# Altium PCB SolarArray1.PcbDoc
Units mm, origin at the board's own origin, x right, y up, seen from the top; angles counter-clockwise.
Board outline 82 x 320 mm, 2 copper layers (Top Layer, Bottom Layer), stack 1.567 mm thick; 59 components, 33 nets, 165 pads, 0 vias.
Unrouted connection lines stored in the file: 73.
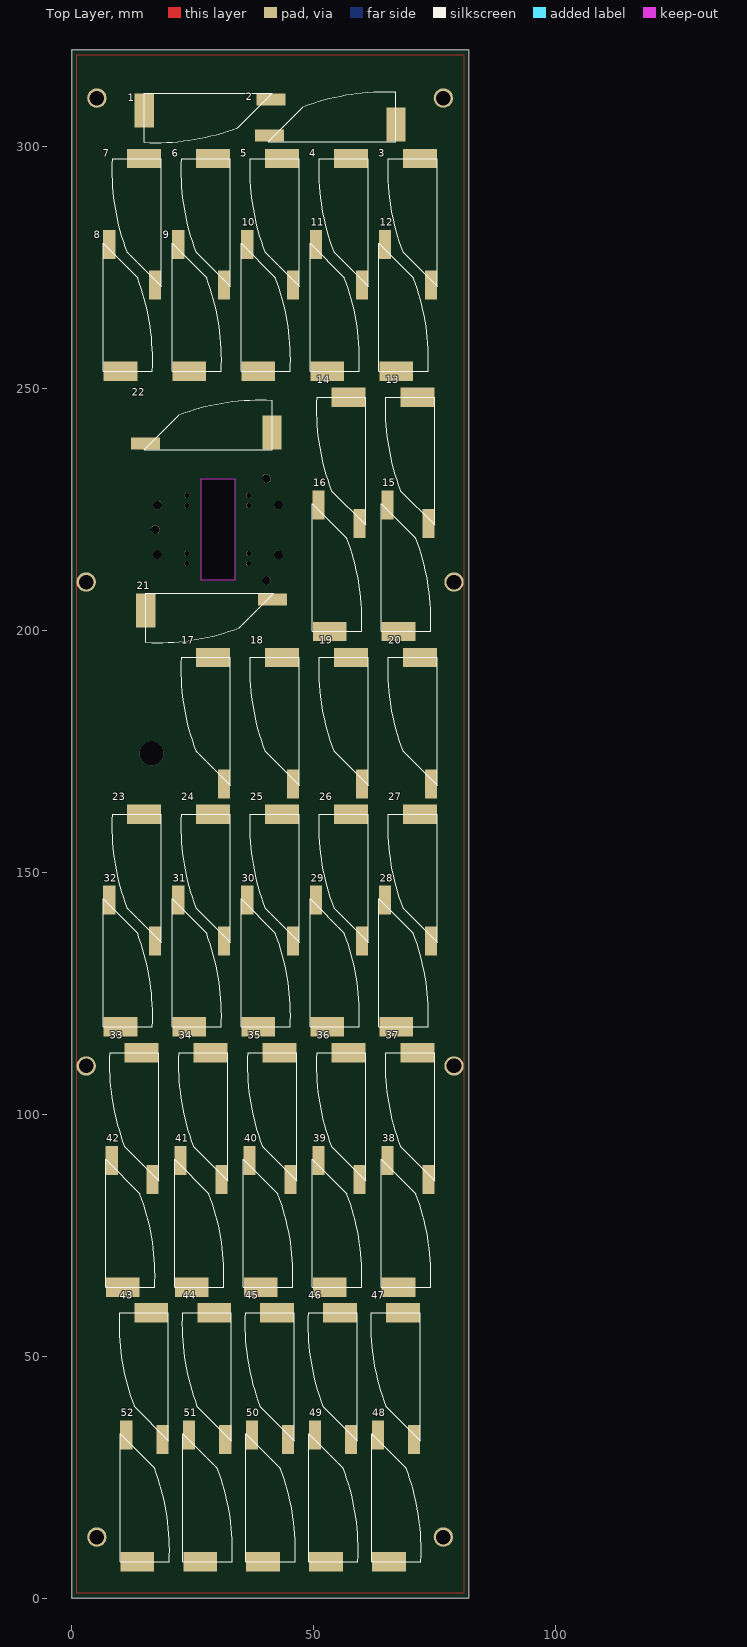
[diagram p0: Top Layer view]
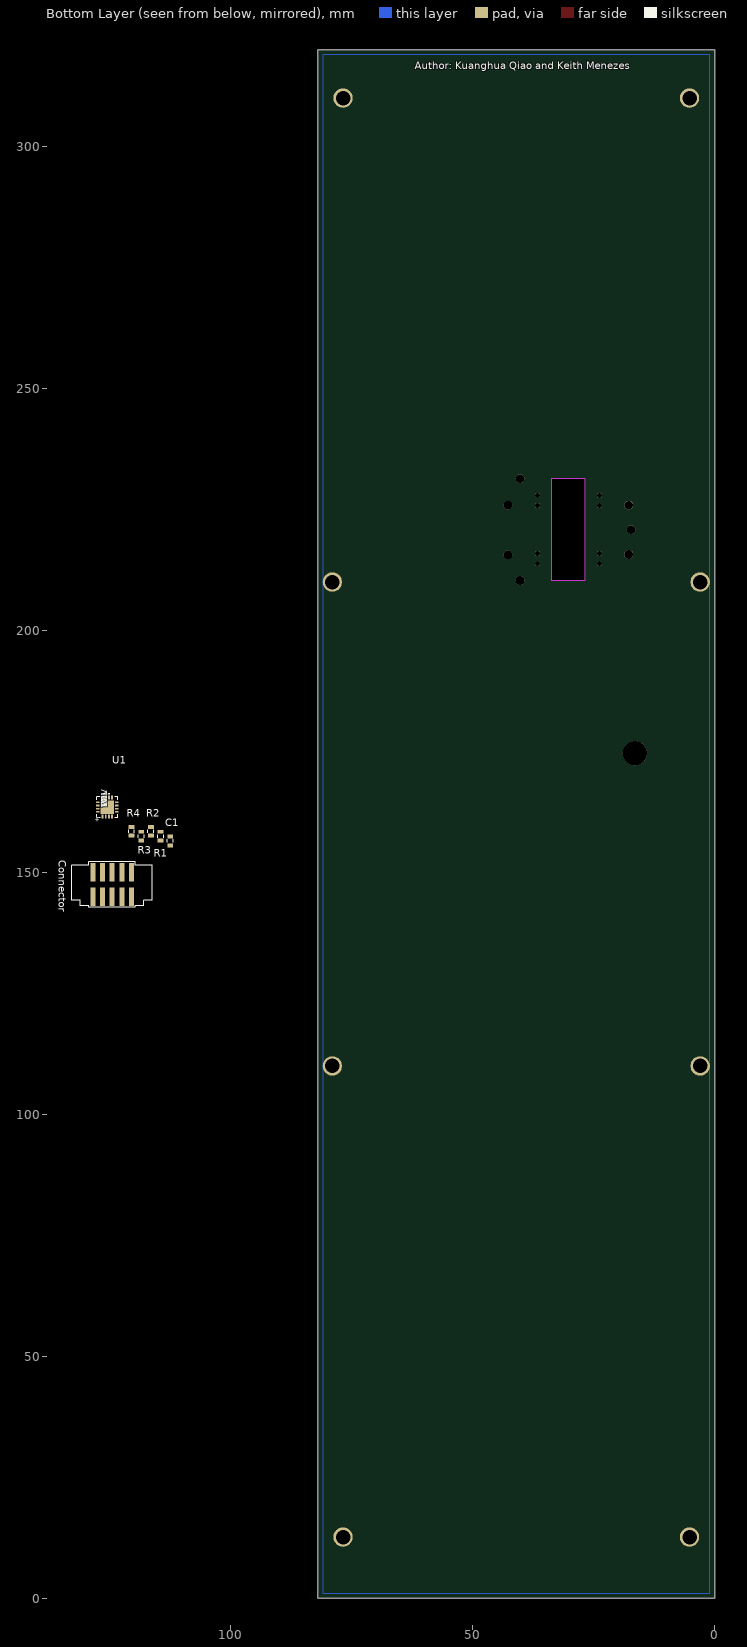
[diagram p1: Bottom Layer view, seen from below]

## Layer stack, top to bottom
Top Solder: solder mask 0.0102, Solder Resist, Dk 3.5
Top Layer: signal copper 0.0356
Dielectric 1: dielectric 1.4961, FR-4, Dk 4.8
Bottom Layer: signal copper 0.0356
Bottom Solder: solder mask 0.0102, Solder Resist, Dk 3.5

## Board outline
82,0 82,320 0,320 0,0
cut-out: 33.721,231.381 33.721,210.381 26.721,210.381 26.721,231.381

## Design rules (kind name [scope] priority, off if disabled: settings)
Clearance [All] p1: gap=0.254 ignorepadtopadclearanceinfootprint=FALSE except(0: Arc-Hole Track-Hole SMDPad-Hole THPad-Hole Via-Hole Fill-Hole Poly-Hole Region-Hole Text-Hole)
PolygonConnect [All] p1: connectstyle=Relief reliefconductorwidth=0.254 reliefentries=4 polygonreliefangle="90 Angle" airgapwidth=0.254
RoutingVias [All] p1: holewidth=0.711 width=1.27 viastyle="Through Hole" minholewidth=0.711 minwidth=1.27 maxholewidth=0.711 maxwidth=1.27
SolderMaskExpansion [All] p1: expansion=0.102
Width [All] p1: maxlimit=1 minlimit=0.254 preferedwidth=0.254 minimp=50.000000 maximp=50.000000 favimp=50.000000
30 further rules are at their usual default settings.

## Components (designator, comment, footprint, x,y, rotation, side; value= is the part's Value field where it differs from the comment)
1 "Trisol X Solar Wing" PCBCOMPONENT_1 44.2,311 r180 top
2 "Trisol X Solar Wing" PCBCOMPONENT_1 37.8,301 r0 top
3 "Trisol X Solar Wing" PCBCOMPONENT_1 75.5,268.3 r90 top
4 "Trisol X Solar Wing" PCBCOMPONENT_1 61.25,268.3 r90 top
5 "Trisol X Solar Wing" PCBCOMPONENT_1 47,268.3 r90 top
6 "Trisol X Solar Wing" PCBCOMPONENT_1 32.75,268.3 r90 top
7 "Trisol X Solar Wing" PCBComponent_1 18.5,268.3 r90 top
8 "Trisol X Solar Wing" PCBComponent_1 6.5,282.8 r270 top
9 "Trisol X Solar Wing" PCBCOMPONENT_1 20.75,282.8 r270 top
10 "Trisol X Solar Wing" PCBCOMPONENT_1 35,282.8 r270 top
11 "Trisol X Solar Wing" PCBCOMPONENT_1 49.25,282.8 r270 top
12 "Trisol X Solar Wing" PCBCOMPONENT_1 63.5,282.8 r270 top
13 "Trisol X Solar Wing" PCBCOMPONENT_1 75,219 r90 top
14 "Trisol X Solar Wing" PCBCOMPONENT_1 60.75,219 r90 top
15 "Trisol X Solar Wing" PCBCOMPONENT_1 64,229 r270 top
16 "Trisol X Solar Wing" PCBCOMPONENT_1 49.75,229 r270 top
17 "Trisol X Solar Wing" PCBCOMPONENT_1 32.75,165.2 r90 top
18 "Trisol X Solar Wing" PCBCOMPONENT_1 47,165.2 r90 top
19 "Trisol X Solar Wing" PCBCOMPONENT_1 61.25,165.2 r90 top
20 "Trisol X Solar Wing" PCBCOMPONENT_1 75.5,165.2 r90 top
21 "Trisol X Solar Wing" PCBCOMPONENT_1 44.548,207.67 r180 top
22 "Trisol X Solar Wing" PCBCOMPONENT_1 12.19,237.344 r0 top
23 "Trisol X Solar Wing" PCBCOMPONENT_1 18.5,132.8 r90 top
24 "Trisol X Solar Wing" PCBCOMPONENT_1 32.75,132.8 r90 top
25 "Trisol X Solar Wing" PCBCOMPONENT_1 47,132.8 r90 top
26 "Trisol X Solar Wing" PCBCOMPONENT_1 61.25,132.8 r90 top
27 "Trisol X Solar Wing" PCBCOMPONENT_1 75.5,132.8 r90 top
28 "Trisol X Solar Wing" PCBCOMPONENT_1 63.5,147.3 r270 top
29 "Trisol X Solar Wing" PCBCOMPONENT_1 49.25,147.3 r270 top
30 "Trisol X Solar Wing" PCBCOMPONENT_1 35,147.3 r270 top
31 "Trisol X Solar Wing" PCBCOMPONENT_1 20.75,147.3 r270 top
32 "Trisol X Solar Wing" PCBCOMPONENT_1 6.5,147.3 r270 top
33 "Trisol X Solar Wing" PCBCOMPONENT_1 18,83.5 r90 top
34 "Trisol X Solar Wing" PCBCOMPONENT_1 32.25,83.5 r90 top
35 "Trisol X Solar Wing" PCBCOMPONENT_1 46.5,83.5 r90 top
36 "Trisol X Solar Wing" PCBCOMPONENT_1 60.75,83.5 r90 top
37 "Trisol X Solar Wing" PCBCOMPONENT_1 75,83.5 r90 top
38 "Trisol X Solar Wing" PCBCOMPONENT_1 64,93.5 r270 top
39 "Trisol X Solar Wing" PCBCOMPONENT_1 49.75,93.5 r270 top
40 "Trisol X Solar Wing" PCBCOMPONENT_1 35.5,93.5 r270 top
41 "Trisol X Solar Wing" PCBCOMPONENT_1 21.25,93.5 r270 top
42 "Trisol X Solar Wing" PCBCOMPONENT_1 7,93.5 r270 top
43 "Trisol X Solar Wing" PCBCOMPONENT_1 20,29.8 r90 top
44 "Trisol X Solar Wing" PCBCOMPONENT_1 33,29.8 r90 top
45 "Trisol X Solar Wing" PCBCOMPONENT_1 46,29.8 r90 top
46 "Trisol X Solar Wing" PCBCOMPONENT_1 59,29.8 r90 top
47 "Trisol X Solar Wing" PCBCOMPONENT_1 72,29.8 r90 top
48 "Trisol X Solar Wing" PCBCOMPONENT_1 62,36.8 r270 top
49 "Trisol X Solar Wing" PCBCOMPONENT_1 49,36.8 r270 top
50 "Trisol X Solar Wing" PCBCOMPONENT_1 36,36.8 r270 top
51 "Trisol X Solar Wing" PCBCOMPONENT_1 23,36.8 r270 top
52 "Trisol X Solar Wing" PCBCOMPONENT_1 10,36.8 r270 top
C1 "100pF" 0805 112.5,156.5 r270 bottom value="1 nF"
Connector "T2M-105-01-L-D-SM" T2M-105-01-X-D-SM 124.5,147.5 r180 bottom
R1 "1K" 0805 114.5,157.5 r270 bottom
R2 "1K" 0805 116.5,158.5 r270 bottom
R3 "1K" 0805 118.5,157.5 r270 bottom
R4 "1K" 0805 120.5,158.5 r270 bottom
U1 "ADT7420UCPZ-R2" CP_16_17 125.5,163.5 r90 bottom value=Value

## Footprints (in the part's own frame and the unit in brackets; to place one, negate y for a bottom-side part, rotate by r counter-clockwise, add the part's x,y. Pads: shape width x height; smd on the part's side, far side on the other; paste and mask are expansions set on the pad)
0805 [mil]
  rect 32x48 smd: 1(-35.43,0) 2(36,0)
  silkscreen extent -12,-24 12,24
CP_16_17 [mil]
  rect 30x14 smd: 1(-77.5,38.39) 2(-77.5,12.8) 3(-77.5,-12.8) 4(-77.5,-38.39) 9(77.5,-38.39) 10(77.5,-12.8) 11(77.5,12.8) 12(77.5,38.39)
  rect 14x30 smd: 5(-38.39,-77.5) 6(-12.8,-77.5) 7(12.8,-77.5) 8(38.39,-77.5) 13(38.39,77.5) 14(12.8,77.5) 15(-12.8,77.5) 16(-38.39,77.5)
  rect 110x110 smd paste-54.5: 17(0,0)
  silkscreen extent -86,-86 112,86, body extent 0,0 10,10, height 10
PCBCOMPONENT_1 [mm]
  rect 6x2.5 smd: 0(3.048,1.27)
  rect 4x6.985 smd: 1(29.21,3.556)
  silkscreen extent 2.79,0 29.21,10.22, body extent 2.89,0.06 29.19,10.1, height 0.24
PCBComponent_1 [mm]
  rect 6x2.5 smd: 0(3.048,1.27)
  rect 4x6.985 smd: 1(29.21,3.556)
  silkscreen extent 2.79,0 29.21,10.22, body extent 2.89,0.06 29.19,10.1, height 0.24
T2M-105-01-X-D-SM [mm]
  rect 1.02x3.8 smd mask+0.05: 1(-4,-2.535) 2(-4,2.535) 3(-2,-2.535) 4(-2,2.535) 5(0,-2.535) 6(0,2.535) 7(2,-2.535) 8(2,2.535) 9(4,-2.535) 10(4,2.535)
  silkscreen extent -8.36,-4.69 8.31,4.69, body extent -7.84,-4.31 7.84,4.31, height 6.5

## Part data
C1: library part CAP0805_1nF, Operating Temperature="-55°C ~ 125°C", Package / Case="0805 (2012 Metric)", Ratings=-, Supplier Part Number 1=445-1330-1-ND, Temperature Coefficient=X7R, Tolerance=±10%, Voltage - Rated=10V, Applications="General Purpose", Category=Capacitors, ComponentLink1Description=http://www.kemet.com/docfinder?Partnumber=C0805C105K8RACTU, ComponentLink1URL=http://www.kemet.com/docfinder?Partnumber=C0805C105K8RACTU, Features=-, Height - Seated (Max)=-, Lead Spacing=-, Lead Style=-, Mounting Type="Surface Mount, MLCC", Packaging="Tape & Reel (TR)", RoHS="RoHS Compliant", Size / Dimension="0.079\" L x 0.049\" W (2.00mm x 1.25mm)", Supplier 1=Digi-Key, Thickness (Max)="0.039\" (1.00mm)"
Connector: library part T2M-105-01-X-D-SM
R1 R2 R3 R4: library part RESISTOR0805-RES_1K, Manufacturer="TE Connectivity", Manufacturer Part Number=1625856-2, Operating Temperature="-55°C ~ 125°C", Package / Case="0805 (2012 Metric)", Power (Watts)="0.125W, 1/8W", Supplier Device Package=0805, Supplier Part Number 1=P1.00KCCT-ND, Temperature Coefficient=±100ppm/°C, Tolerance=±10%, Category=Resistors, ComponentLink1Description=http://www.te.com/commerce/DocumentDelivery/DDEController?Action=srchrtrv&DocNm=1625856&DocType=Customer+Drawing&DocLang=English, ComponentLink1URL=http://www.te.com/commerce/DocumentDelivery/DDEController?Action=srchrtrv&DocNm=1625856&DocType=Customer+Drawing&DocLang=English, Composition="Thick Film", Features=-, Height="0.020\" (0.50mm)", Number of Terminations=2, Packaging="Cut Tape (CT)", Resistance (Ohms)=1K, RoHS="RoHS Compliant", Size / Dimension="0.079\" L x 0.047\" W (2.00mm x 1.20mm)", Supplier 1=Digi-Key, Supplier 2=Newark, Supplier Part Number 2=38K0327
U1: "Imported", Manufacturer_Part_Number=ADT7420UCPZ-R2, RefDes=RefDes, Type=Type, Vendor="Analog Devices Inc"

## Free pads (board coordinates)
  round 4 hole 3: 1(3,110) 1(3,210) 1(5.2,12.65) 1(5.2,310) 1(76.8,12.65) 1(76.8,310) 1(79,110) 1(79,210)
  round 5 hole 5: 1(16.5,174.6)
  round 1.8 hole 1.8: 1(17.277,220.813) 1(17.747,215.691) 1(17.747,225.891) 1(40.215,210.326) 1(40.215,231.348) 1(42.72,215.6) 1(42.72,225.9)
  round 1 hole 1: 1(23.805,213.813) 1(23.805,215.889) 1(23.805,225.803) 1(23.805,227.878) 1(36.605,213.813) 1(36.605,215.889) 1(36.605,225.813) 1(36.605,227.889)

## Nets (pads, with @x,y where several pads share a name; then routed paths per layer and width w, separated by ;. In a path a pad name is that pad's centre, name@x,y a point inside that pad or via, vN(x,y) a via of type N, cw(c..) or ccw(c..) an arc to the next point about the centre after c; other vN are vias at no path point)
Net1_0: 1.0 2.1
Net1_1: 1.1 3.1 4.1 5.1 6.1 7.1 13.1 14.1 17.1 19.1 21.1 23.1 24.1 25.1 26.1 27.1 33.1 34.1 35.1 36.1 37.1 43.1 44.1 45.1 46.1 47.1 C1.1 Connector.3 Connector.4 pad.1@3,110 pad.1@3,210 pad.1@5.2,12.65 pad.1@5.2,310 pad.1@76.8,12.65 pad.1@76.8,310 pad.1@79,110 pad.1@79,210 R2.2 R4.2 U1.11
Net2_0: 2.0 8.0 9.0 10.0 11.0 12.0 15.0 16.0 18.0 20.0 22.0 28.0 29.0 30.0 31.0 32.0 38.0 39.0 40.0 41.0 42.0 48.0 49.0 50.0 51.0 52.0 Connector.1 Connector.2
Net3_0: 3.0 12.1
Net4_0: 4.0 11.1
Net5_0: 5.0 10.1
Net6_0: 6.0 9.1
Net7_0: 7.0 8.1
Net13_0: 13.0 15.1
Net14_0: 14.0 16.1
Net17_0: 17.0 18.1
Net19_0: 19.0 20.1
Net21_0: 21.0 22.1
Net23_0: 23.0 32.1
Net24_0: 24.0 31.1
Net25_0: 25.0 30.1
Net26_0: 26.0 29.1
Net27_0: 27.0 28.1
Net33_0: 33.0 42.1
Net34_0: 34.0 41.1
Net35_0: 35.0 40.1
Net36_0: 36.0 39.1
Net37_0: 37.0 38.1
Net43_0: 43.0 52.1
Net44_0: 44.0 51.1
Net45_0: 45.0 50.1
Net46_0: 46.0 49.1
Net47_0: 47.0 48.1
NetC1_2: C1.2 Connector.5 Connector.6 R1.2 R3.2 U1.12
NetConnector_7: Connector.7 Connector.8 U1.2
NetConnector_9: Connector.9 Connector.10 U1.1
NetR1_1: R1.1 R2.1 U1.4
NetR3_1: R3.1 R4.1 U1.3
pads on no net: U1.5 U1.6 U1.7 U1.8 U1.9 U1.10 U1.13 U1.14 U1.15 U1.16 U1.17

## Polygon pours and split planes (outlines as drawn)
Net2_0 on Top Layer "Array_pos" (solid, shelved, pour order 2): 81,1 1,1 1,319 81,319
Net1_0 on Bottom Layer "Array_neg" (solid, shelved, pour order 4): 81,1 1,1 1,319 81,319

## Silkscreen, mask and mechanical layers (free items; w line width, h text height)
Bottom Overlay:
  text "Author: Kuanghua Qiao and Keith Menezes" at 62,316 h1.52

## Text inside footprints (layer, text, board x,y; h text height)
Connector: Mechanical 1 "J1" at 124.997,146.992 h0.76
U1: Bottom Overlay "TOL" at 125.5,163.5 h1.27 r270; Bottom Overlay "VAL" at 125.5,163.5 h1.27 r270; Bottom Overlay "DEV" at 125.5,163.5 h1.27 r270; Bottom Overlay "PN" at 125.5,163.5 h1.27 r270; Bottom Overlay "*" at 126.8,160.516 h1.27 r270; Mechanical 13 "RefDes2" at 125.5,163.5 h1.27 r270; Mechanical 13 "*" at 126.8,161.913 h1.27 r270